# EAGLE board Control_PCB_NiclaSense_Open-source (EAGLE 9.6.2)
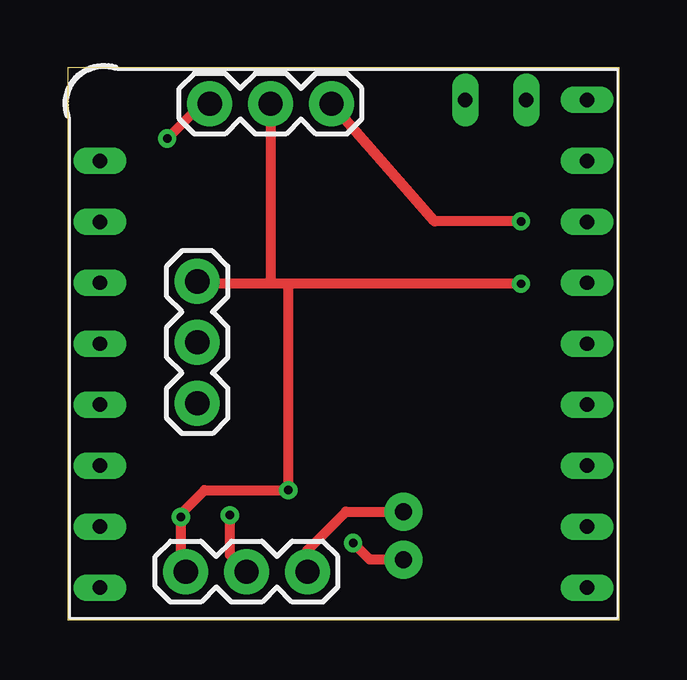
[diagram p0: board, top side]
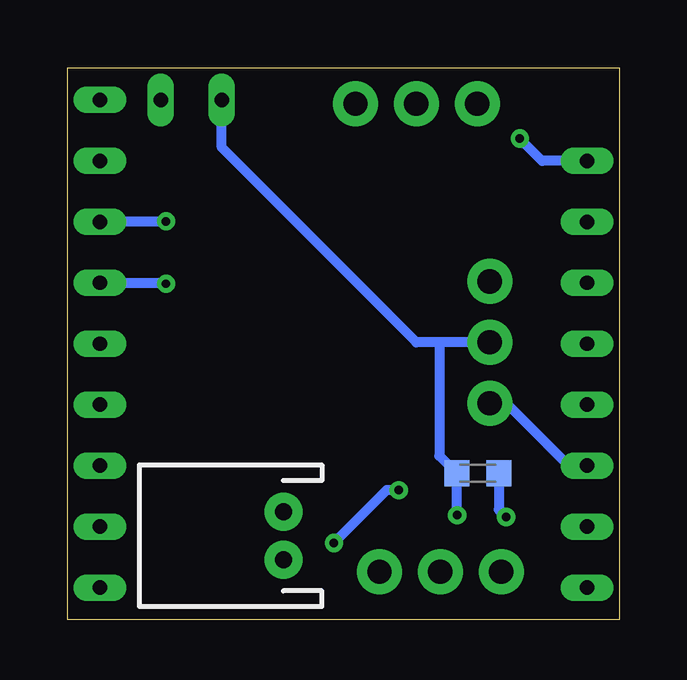
[diagram p1: board, bottom side, seen from below]

Size 23 x 23 mm. Coordinates in mm from the lower left corner, seen from the top.
Outline: 0,0 23,0 23,23 0,23 0,0
Copper layers (1*16): Top 0.035mm / dielectric 1.5mm / Bottom 0.035mm
Design rules "default *": minimum track width 6mil, minimum drill 0.35mm, track to track 0.2mm, track to pad 0.2mm, pad to pad 0.2mm, via to via 0.2mm, smd to smd 0.2mm, copper to edge 0.2mm, drill to drill 0.2mm, minimum pad ring 10mil, minimum via ring 8mil, stop-mask expansion 4mil, vias tented up to drill 0mil, thermal gap 10mil

## Footprints (pad centres in the part's own frame; a part is rotated, then mirrored left to right if it is on the bottom)
JST-2-PTH = drill 0.7 pad 1.6: 1 -1,0; 2 1,0
C0603K = smd 1.05 x 1.08: 1 -0.875,0; 2 0.875,0
1X03 = drill 1.016 pad 1.88: 1 0,0; 2 2.54,0; 3 5.08,0
ARDUINO_NICLA = drill 0.6 long: 1 5.08,10.16; 2 7.62,10.16; 3 10.16,10.16; 4 -10.16,7.62; 5 -10.16,5.08; 6 -10.16,2.54; 7 -10.16,0; 8 -10.16,-2.54; 9 -10.16,-5.08; 10 -10.16,-7.62; 11 -10.16,-10.16; 12 10.16,7.62; 13 10.16,5.08; 14 10.16,2.54; 15 10.16,0; 16 10.16,-2.54; 17 10.16,-5.08; 18 10.16,-7.62; 19 10.16,-10.16

## Placement (x,y rotation side)
BATTERY  [JST-2-PTH]  14,3.5 90 bottom
C1  0.1uF  [C0603K]  5.9,6.1 0 bottom
J2  455-1750-1-ND  [1X03]  5.4,14.1 270 top
J3  455-1750-1-ND  [1X03]  10,2 180 top
SD  sadasd  [1X03]  11,21.5 180 top
U$1  ARDUINO_NICLA  [ARDUINO_NICLA]  11.5,11.5 0 top

## Library data of the parts
BATTERY = SparkFun-Connectors; PROD_ID: CONN-09863; SKU: PRT-09914
C1 = rcl; SPICEPREFIX: C
J2 J3 SD = SparkFun-Connectors; PROD_ID: XXX-00000
U$1 = ArduinoNicla

## Nets
3.3V: SD.1 U$1.13
3.7V: BATTERY.2 J3.1
EMG: SD.3 U$1.4
GND: BATTERY.1 C1.2 J2.1 J3.3 SD.2 U$1.14
SERVO: J2.3 U$1.9
VIN: C1.1 J2.2 J3.2 U$1.1

## Tracks (layer width: path | path; a pad name or v marks a point on that pad's centre or on a via)
3.3V  (via drill 0.35)
  Top 0.406: v18.9,16.6 15.3,16.6 SD.1
  Bottom 0.406: v18.9,16.6 18.92,16.58 U$1.13
3.7V
  Top 0.406: J3.1 10,2.9 11.6,4.5 BATTERY.2
EMG  (via drill 0.35)
  Top 0.406: v4.15,20.05 5.6,21.5 SD.3
  Bottom 0.406: U$1.4 3.22,19.12 v4.15,20.05
GND  (via drill 0.35)
  Top 0.406: BATTERY.1 12.6,2.5 v11.9,3.2 | v18.9,14 9.2,14 | 9.2,14 v9.2,5.4 5.7,5.4 4.72,4.42 v4.72,4.28 4.72,2.2 J3.3 | J2.1 5.5,14 8.5,14 | 9.2,14 8.5,14 | 8.5,14 8.46,14.04 SD.2
  Bottom 0.406: U$1.14 18.9,14.04 v18.9,14 | v9.2,5.4 9.7,5.4 v11.9,3.2 | 4.72,5.78 5.03,6.08 C1.2 5.03,4.58 v4.72,4.28
SERVO
  Bottom 0.406: J2.3 4.7,9.02 2.1,6.42 U$1.9
VIN  (via drill 0.35)
  Top 0.406: v6.76,4.36 6.76,2.7 J3.2
  Bottom 0.406: U$1.1 16.58,19.68 8.46,11.56 7.5,11.56 | v6.76,4.36 6.78,4.38 C1.1 7.5,6.83 7.5,11.56 | J2.2 7.5,11.56